# Altium PCB uz_per_torque_box.PcbDoc
Units mm, origin at the board's own origin, x right, y up, seen from the top; angles counter-clockwise.
Board outline 50 x 80 mm, 4 copper layers (Top Layer, Layer 1, Layer 2, Bottom Layer), stack 0.98 mm thick; 35 components, 27 nets, 113 pads, 16 vias.
Unrouted connection lines stored in the file: 108.
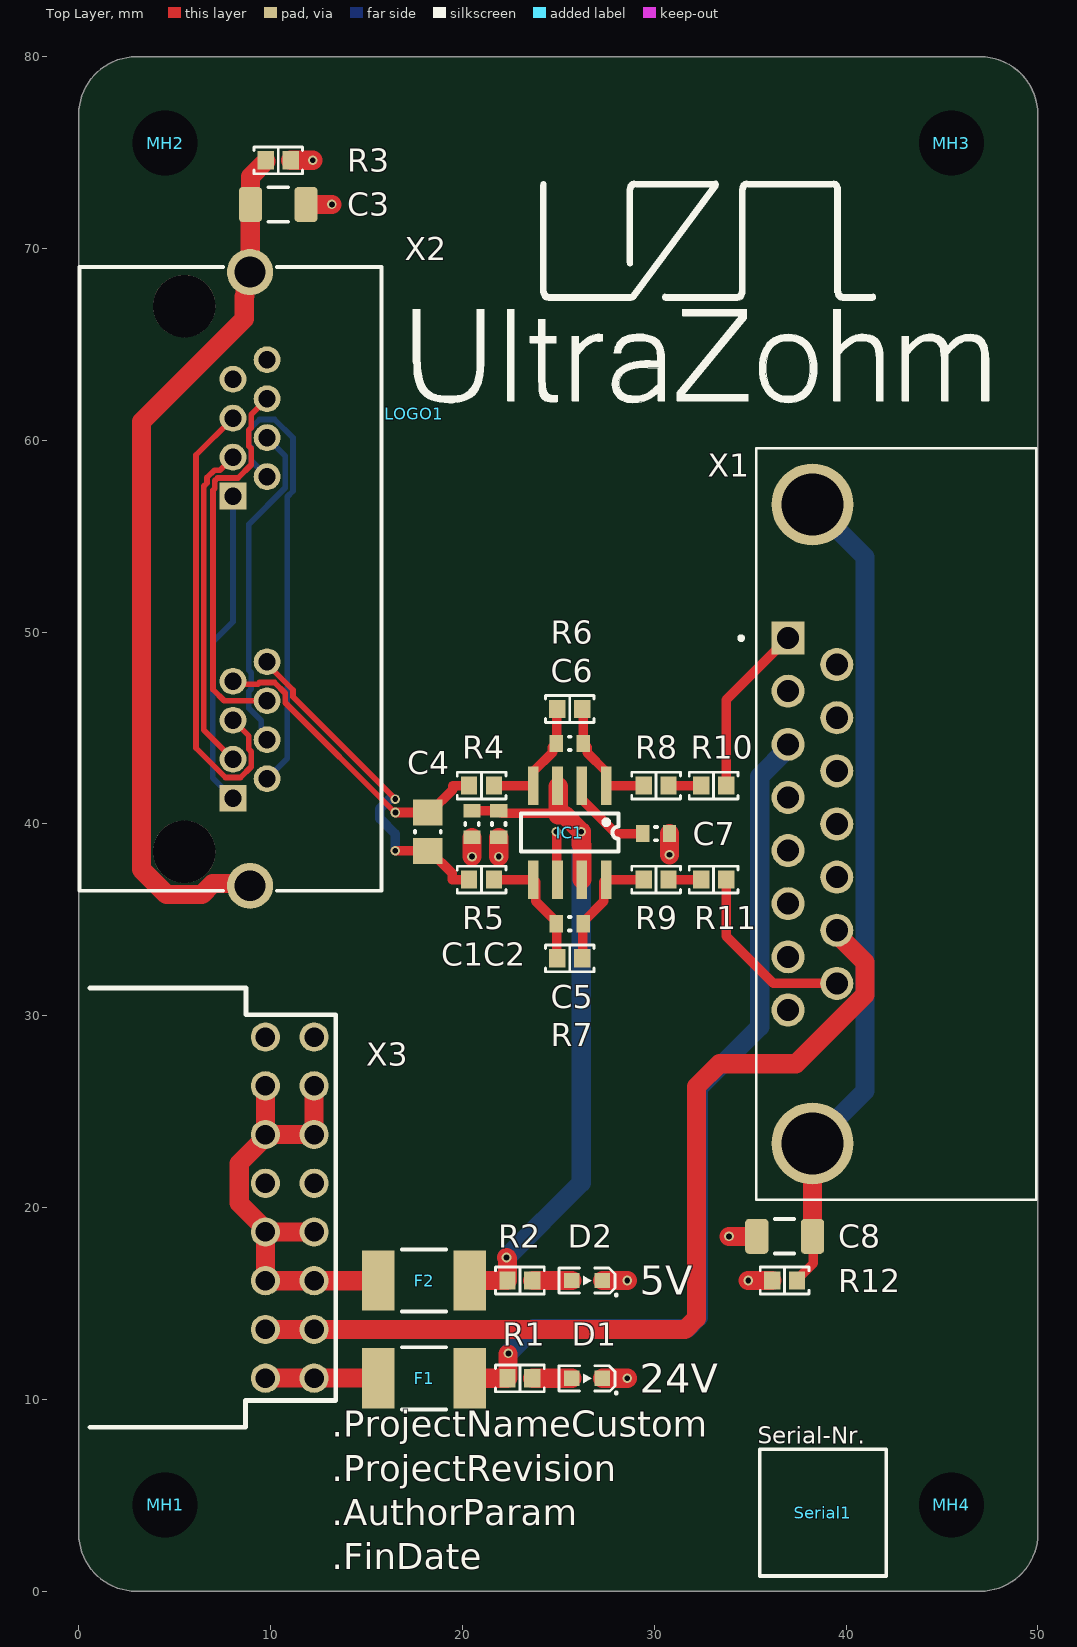
[diagram p0: Top Layer view]
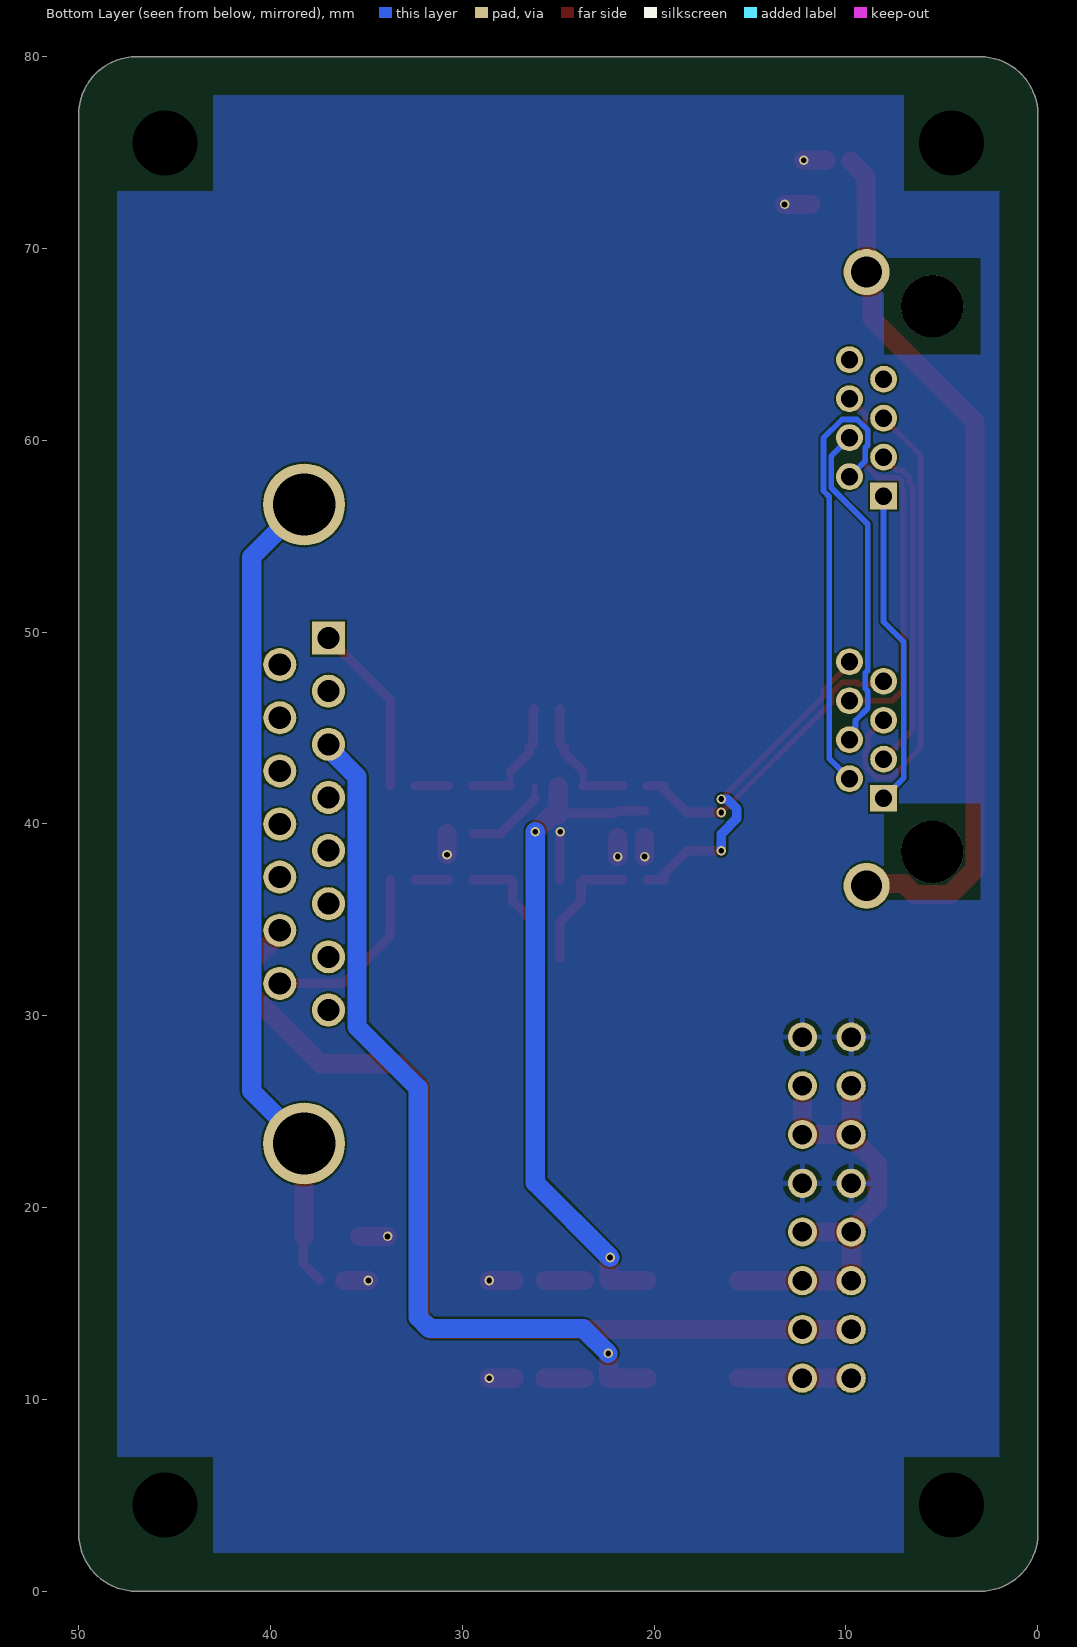
[diagram p1: Bottom Layer view, seen from below]
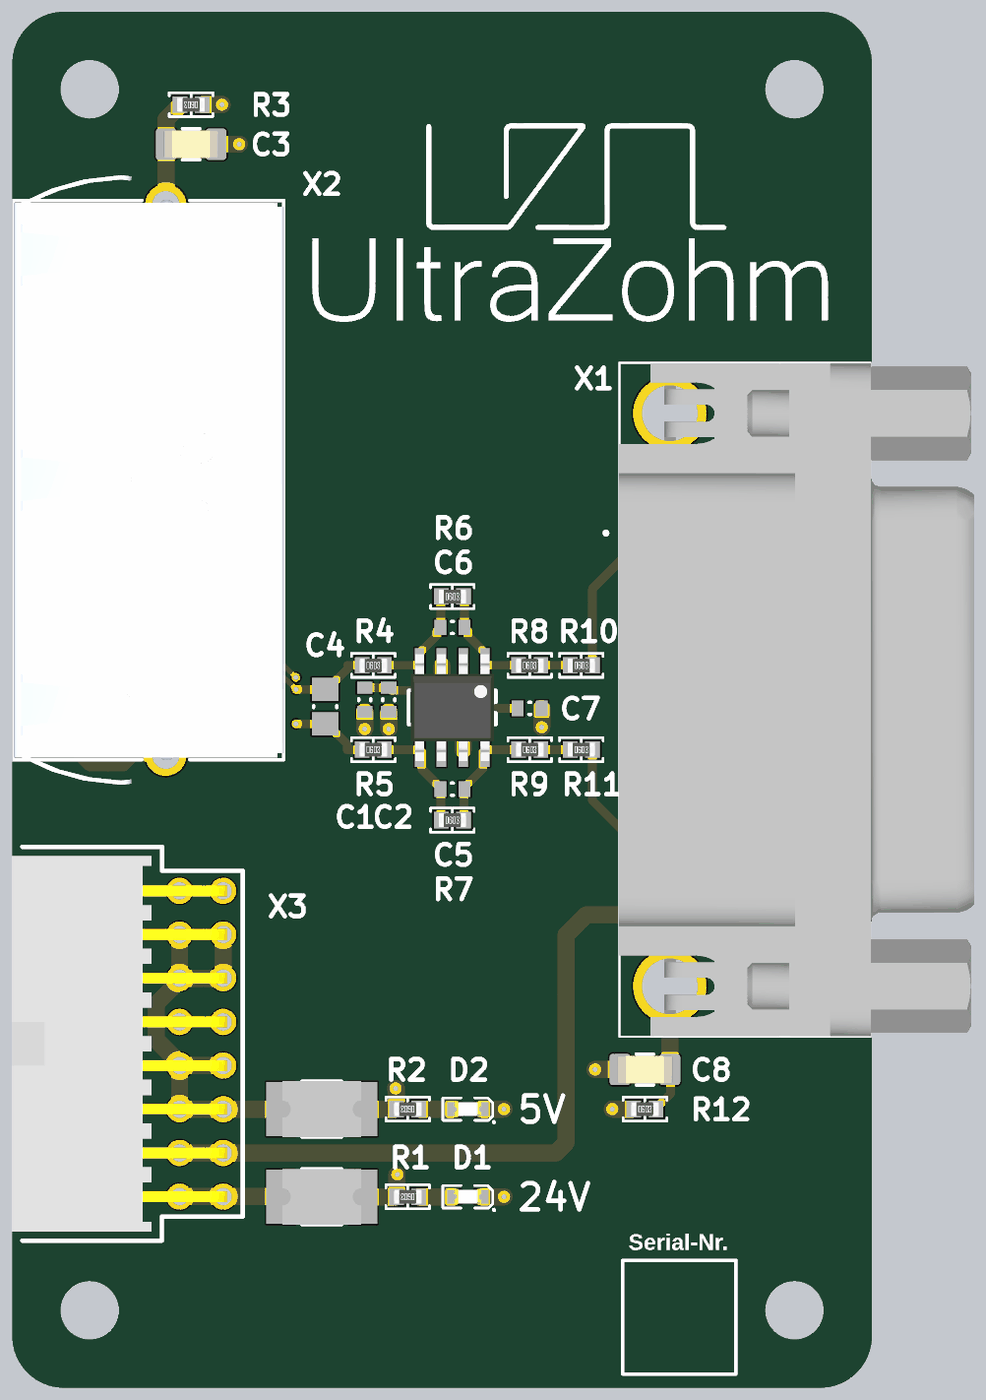
[diagram p2: 3D render of the assembled board from above, using the file's embedded part models]

## Layer stack, top to bottom
Top Solder: solder mask 0.0102, Solder Resist, Dk 3.5
Top Layer: signal copper 0.035
Dielectric 2: prepreg 0.115, FR-4, Dk 4.4
Dielectric 4: prepreg 0.115, FR-4, Dk 4.4
Layer 1: signal copper 0.035
Dielectric 1: core 0.38, Core-036, Dk 4.4
Layer 2: signal copper 0.035
Dielectric 5: prepreg 0.115, FR-4, Dk 4.4
Dielectric 3: prepreg 0.115, FR-4, Dk 4.4
Bottom Layer: signal copper 0.035
Bottom Solder: solder mask 0.0102, Solder Resist, Dk 3.5

## Board outline
0,3 ccw(c3,3) 3,0 47,0 ccw(c47,3) 50,3 50,77 ccw(c47,77) 47,80 3,80 ccw(c3,77) 0,77

## Design rules (kind name [scope] priority, off if disabled: settings)
AssemblyTestPointUsage [InNetClass('3V3_SingleEnded') or InNetClass('5V_SingleEnded') or InNetClass('15V_SingleEnded') or InNetClass('DifferentialSignals')] p1:
BoardOutlineClearance [All] p1: gap=0.5 ignorepadtopadclearanceinfootprint=FALSE except(0: Arc-SplitContinuation Track-SplitContinuation SMDPad-SplitContinuation THPad-SplitContinuation Via-SplitContinuation Fill-SplitContinuation Poly-SplitContinuation Region-SplitContinuation Text-SplitContinuation)
Clearance Clearance_Differential [InNetClass('DifferentialSignals')] p1: gap=0.1 ignorepadtopadclearanceinfootprint=TRUE except(0: Arc-Hole Track-Hole SMDPad-Hole THPad-Hole Via-Hole Fill-Hole Poly-Hole Region-Hole Text-Hole; 0.3: SMDPad-Via; 0.4: THPad-Via)
Clearance Clearance_Power [InNetClass('Power')] p2: gap=0.1 ignorepadtopadclearanceinfootprint=TRUE except(0: Arc-Hole Track-Hole SMDPad-Hole THPad-Hole Via-Hole Fill-Hole Poly-Hole Region-Hole Text-Hole; 0.15: Via-Poly; 0.2: Track-Poly; 0.25: THPad-Poly; 0.3: Fill-Poly Poly-Region; 0.5: Poly-Poly)
Clearance [All] p3: gap=0.1 ignorepadtopadclearanceinfootprint=TRUE except(0: Arc-Hole Track-Hole SMDPad-Hole THPad-Hole Via-Hole Fill-Hole Poly-Hole Region-Hole Text-Hole; 0.4: SMDPad-Via THPad-Via; 0.5: Poly-Poly)
ComponentClearance [All] p1: gap=0.1 collisioncheckmode=3 verticalgap=0.1 showdistances=FALSE
DiffPairsRouting [InNetClass('DifferentialSignals')] p1: maxlimit=0.25 minlimit=0.127 mostfreqgap=0.25 toplayer_maxgap=0.127 toplayer_prefgap=0.127 toplayer_minwidth=0.285 toplayer_maxwidth=0.285 toplayer_prefwidth=0.285 midlayer1_minwidth=0.069 midlayer1_maxwidth=0.15 midlayer1_prefwidth=0.15 midlayer2_mingap=0.165 midlayer2_minwidth=0.1 midlayer2_maxwidth=0.15 midlayer2_prefwidth=0.15 bottomlayer_maxgap=0.127 bottomlayer_prefgap=0.127 bottomlayer_minwidth=0.285 bottomlayer_maxwidth=0.285 bottomlayer_prefwidth=0.285 impedanceprofiledriven=TRUE impedanceprofileid={5F7DE71B-7B0B-4CDE-8AE7-8AD61221F3A5} impedanceprofilevalue=100.000000 maxuncoupledlength=12.7
FanoutControl Fanout_Power [InNetClass('Power') or InNet('ENABLE')] p1: bgadir=Out bgaviamode=Centered fanoutstyle=Auto fanoutdirection=None viagrid=0.025
FanoutControl Fanout_RS422 [InNetClass('DifferentialSignals')] p2: bgadir=Out bgaviamode=Closest fanoutstyle=Rows fanoutdirection=OutOnly viagrid=0.025
FanoutControl Fanout_BGA [IsBGA] p3 off: bgadir=Out bgaviamode=Centered fanoutstyle=Auto fanoutdirection=Alternating viagrid=0.025 // Fanout_BGA (Default Rule)
FanoutControl Fanout_LCC [IsLCC] p4 off: bgadir=Out bgaviamode=Centered fanoutstyle=Auto fanoutdirection=Alternating viagrid=0.025 // Fanout_LCC (Default Rule)
FanoutControl Fanout_SOIC [IsSOIC] p5 off: bgadir=Out bgaviamode=Centered fanoutstyle=Auto fanoutdirection=Alternating viagrid=0.025 // Fanout_SOIC (Default Rule)
FanoutControl Fanout_Small [(CompPinCount < 5)] p6 off: bgadir=Out bgaviamode=Centered fanoutstyle=Auto fanoutdirection=OutThenIn viagrid=0.025 // Fanout_Small (Default Rule)
FanoutControl Fanout_Default [All] p7: bgadir=NE bgaviamode=Closest fanoutstyle=Rows fanoutdirection=InOnly viagrid=0.025 // Fanout_Default (Default Rule)
Height [All] p1: minheight=0 maxheight=50 prefheight=12.7
HoleSize [All] p1: absolutevalues=TRUE maxlimit=4 minlimit=0.025 maxpercent=80.000 minpercent=20.000
PolygonConnect PolygonConnect_Therm [HoleSize > 2.6] p1: connectstyle=Direct reliefconductorwidth=0.254 reliefentries=4 polygonreliefangle="90 Angle" airgapwidth=0.254
PolygonConnect PolygonConnect_via [InPadClass('pad') or IsVia] p2: connectstyle=Direct reliefconductorwidth=0.254 reliefentries=4 polygonreliefangle="90 Angle" airgapwidth=0.254
PolygonConnect [All] p3: connectstyle=Relief reliefconductorwidth=0.3 reliefentries=4 polygonreliefangle="90 Angle" airgapwidth=0.25
RoutingLayers RoutingLayers_3V3Signals [InNetClass('3V3_SingleEnded')] p1 off: top layer_v5=TRUE mid layer 1_v5=TRUE mid layer 2_v5=TRUE bottom layer_v5=TRUE
RoutingLayers RoutingLayers_SingleEnded [InNetClass('15V_SingleEnded') or InNetClass('3V3_SingleEnded') or InNetClass('5V_SingleEnded')] p2 off: top layer_v5=TRUE mid layer 1_v5=TRUE mid layer 2_v5=TRUE bottom layer_v5=TRUE
RoutingLayers RoutingLayers_Differential [InNetClass('DifferentialSignals')] p3 off: top layer_v5=TRUE mid layer 1_v5=TRUE mid layer 2_v5=TRUE bottom layer_v5=FALSE
RoutingLayers [All] p4: top layer_v5=TRUE mid layer 1_v5=TRUE mid layer 2_v5=TRUE bottom layer_v5=TRUE
RoutingVias [All] p1: holewidth=0.3 width=0.5 viastyle="Through Hole" minholewidth=0.2 minwidth=0.4 maxholewidth=0.5 maxwidth=1
SolderMaskExpansion [All] p1: expansion=0.102 istentingtop=FALSE
SupplyNets "Schematic Supply Nets_9" [InNet('GND_VIN')] p1: voltage=0.000
SupplyNets "Schematic Supply Nets_8" [InNet('Supply+')] p2: voltage=0.000
SupplyNets "Schematic Supply Nets_7" [InNet('5V_ext')] p3: voltage=0.000
SupplyNets "Schematic Supply Nets_6" [InNet('GND')] p4: voltage=0.000
SupplyNets "Schematic Supply Nets_4" [InNet('VIN_unfused')] p5: voltage=0.000
SupplyNets "Schematic Supply Nets_2" [InNet('5V')] p6: voltage=0.000
UnRoutedNet UnRoutedNet_Signals [InNetClass('15V_SingleEnded') or InNetClass('3V3_SingleEnded') or InNetClass('5V_SingleEnded') or InNetClass('DifferentialSignals')] p1: checkbadconnections=TRUE
UnRoutedNet [All] p2: checkbadconnections=TRUE
Width Width_Power [InNetClass('Power')] p1: maxlimit=10 minlimit=0.2 preferedwidth=0.3 minimp=50.000000 maximp=50.000000 favimp=50.000000
Width [All] p2: maxlimit=10 minlimit=0.1 preferedwidth=0.3 midlayer1_prefwidth=0.15 midlayer2_prefwidth=0.15 minimp=50.000000 maximp=50.000000 favimp=50.000000
18 further rules are at their usual default settings.

## Classes and differential pairs
component class Torque_Signal_Conditioning: C1 C2 C3 C4 C5 C6 C7 C8 D1 D2 F1 F2 IC1 MH1 MH2 MH3 MH4 R1 R2 R3 R4 R5 R6 R7 R8 R9 R10 R11 R12 Torque_Signal_Conditioning X1 X2 X3
differential pair RJ: +RJ_P -RJ_N
differential pair Torque: +Torque_P -Torque_N

## Components (designator, comment, footprint, x,y, rotation, side; value= is the part's Value field where it differs from the comment)
C1 "0.1 µF" C_0603 20.5,40 r90 top
C2 "1 nF" C_0603 21.9,40 r90 top
C3 "100 pF" C_1206 10.4,72.3 r0 top
C4 "2.2 µF" C_0805 18.2,39.6 r90 top
C5 "22 pF" C_0603 25.6,34.8 r180 top
C6 "22 pF" C_0603 25.6,44.2 r180 top
C7 "1 µF" C_0603 30.1,39.5 r180 top
C8 "100 pF" C_1206 36.8,18.5 r180 top
D1 "150060BS84000" WL-SMCW_0603 26.5,11.1 r180 top
D2 "150060BS84000" WL-SMCW_0603 26.5,16.2 r180 top
F1 "Littelfuse_PTC_1812" 1812_PTC_Polyfuse_Littelfuse 18,11.1 r0 top value="PTC, 1.1 A, 24V"
F2 "Littelfuse_PTC_1812" 1812_PTC_Polyfuse_Littelfuse 18,16.2 r0 top value="PTC, 1.1 A, 24V"
IC1 "ADA4940-1ARZ-R7" SOIC-8-N 27.5,42 r270 top value="differential ADC driver"
INFO1 "Design Information" Design_info -8.5,-4.3 r0 top
LOGO1 "UZ Logo" UZ_Logo_small 17.5,61.4 r0 top
MH1 "Mounting Hole" MH_3.4#1 4.5,2.7 r90 top
MH2 "Mounting Hole" MH_3.4#2 4.4,74.4 r90 top
MH3 "Mounting Hole" MH_3.4#3 44.9,73.6 r90 top
MH4 "Mounting Hole" MH_3.4#4 47.4,4.9 r90 top
R1 "24k9" "RES 0603_1608" 23,11.1 r180 top
R2 "3k" "RES 0603_1608" 23,16.2 r180 top
R3 "1M" "RES 0603_1608" 10.4,74.6 r180 top
R4 "51R1" "RES 0603_1608" 21,42 r0 top
R5 "51R1" "RES 0603_1608" 21,37.1 r0 top
R6 "1k" "RES 0603_1608" 25.6,46 r0 top
R7 "1k" "RES 0603_1608" 25.6,33 r0 top
R8 "1k" "RES 0603_1608" 30.1,42 r0 top
R9 "1k" "RES 0603_1608" 30.1,37.1 r0 top
R10 "1k" "RES 0603_1608" 33.1,42 r0 top
R11 "1k" "RES 0603_1608" 33.1,37.1 r0 top
R12 "1M" "RES 0603_1608" 36.8,16.2 r0 top
Serial1 "Serialnumber 6.3 x 6.3 mm" SERIAL_6.3X6.3MM 38.8,4.1 r0 top value=REV
X1 "SUB-DRBF-607A-002" "PCB - MISC - DSUB15" 38.25,40 r90 top
X2 "RJHSE538002" RJHSE-5380-02 5.5,67 r270 top
X3 "IPL1-108-01-L-D-RA-K" IPL1-108-01-L-D-RA-K 11,20 r90 top

## Footprints (in the part's own frame and the unit in brackets; to place one, negate y for a bottom-side part, rotate by r counter-clockwise, add the part's x,y. Pads: shape width x height; smd on the part's side, far side on the other; paste and mask are expansions set on the pad)
1812_PTC_Polyfuse_Littelfuse [mm] "Chip Fuse, 2-Leads, Body 4.6x3.24mm"
  rect 1.68x3.14 smd: 1(-2.39,0) 2(2.39,0)
  silkscreen extent -1.15,-1.62 1.15,1.62, body extent -2.3,-1.62 2.3,1.62, height 1.15
C_0603 [mm] "Chip Capacitor, Body 1.6x0.8mm, Height 1.0mm, IPC High Density"
  rect 0.7x0.9 smd: 1(-0.7,0) 2(0.7,0)
  silkscreen extent -0.05,-0.35 0.05,0.35, body extent -0.87,-0.47 0.88,0.48, height 1
C_0805 [mm] "Chip Capacitor, Body 2.0x1.2mm, Height 1.45mm, IPC Low Density"
  rect 1.35x1.55 smd: 1(-1,0) 2(1,0)
  silkscreen extent -0.05,-0.67 0.05,0.67, body extent -1.1,-0.72 1.1,0.72, height 1.45
C_1206 [mm]
  rrect33% 1.21x1.82 smd: 1(1.45,0) 2(-1.45,0)
  silkscreen extent -0.5,-0.9 0.5,0.9, body extent -1.6,-0.81 1.6,0.81, height 1.82
Design_info [mm] "Design information about the PCB"
IPL1-108-01-L-D-RA-K [mil]
  round 60 hole 40 mask+3: 1(-350,50) 2(-250,50) 3(-150,50) 4(-50,50) 5(50,50) 6(150,50) 7(250,50) 8(350,50) 9(-350,-50) 10(-250,-50) 11(-150,-50) 12(-50,-50) 13(50,-50) 14(150,-50) 15(250,-50) 16(350,-50)
  silkscreen extent -451,-94 451,410, body extent -430,-58 430,434, height 310
MH_3.4#1 [mm]
  round 3.1 hole 3.4 unplated: 1(1.8,0)
MH_3.4#2 [mm]
  round 3.1 hole 3.4 unplated: 1(1.1,-0.1)
MH_3.4#3 [mm]
  round 3.1 hole 3.4 unplated: 1(1.9,-0.6)
MH_3.4#4 [mm]
  round 3.1 hole 3.4 unplated: 1(-0.4,1.9)
"PCB - MISC - DSUB15" [mm]
  rect 1.725x1.725 / inner round 1.725 / far side rect 1.725x1.725 hole 1.15: 1(9.695,1.27)
  round 1.725 hole 1.15: 2(6.925,1.27) 3(4.155,1.27) 4(1.385,1.27) 5(-1.385,1.27) 6(-4.155,1.27) 7(-6.925,1.27) 8(-9.695,1.27) 9(8.31,-1.27) 10(5.54,-1.27) 11(2.77,-1.27) 12(0,-1.27) 13(-2.77,-1.27) 14(-5.54,-1.27) 15(-8.31,-1.27)
  round 4.266 hole 3.25: S1(-16.66,0) S2(16.66,0)
  silkscreen extent -19.6,-11.67 19.6,3.82, body extent -19.57,-17.7 19.57,2.95, height 13.79
"RES 0603_1608" [mm] "Chip Resistor, 2-Leads, Body 1.60x0.80mm, IPC Medium Density"
  rect 0.85x0.95 smd: 1(-0.65,0) 2(0.65,0)
  silkscreen extent -1.27,-0.7 1.27,0.7, body extent -0.8,-0.4 0.8,0.4, height 0.45
RJHSE-5380-02 [mm] "Modular Jack Horizontal Shielded Dual Port 8P8C Tab Up"
  rect 1.4x1.4 hole 0.9: A1(9.906,2.54) B1(25.654,2.54)
  round 1.4 hole 0.9: A2(8.89,4.318) A3(7.874,2.54) A4(6.858,4.318) A5(5.842,2.54) A6(4.826,4.318) A7(3.81,2.54) A8(2.794,4.318) B2(24.638,4.318) B3(23.622,2.54) B4(22.606,4.318) B5(21.59,2.54) B6(20.574,4.318) B7(19.558,2.54) B8(18.542,4.318)
  round 3.25 hole 3.25 unplated: MH1(0,0) MH2(28.448,0)
  round 2.4 hole 1.6: S1(-1.778,3.429) S2(30.226,3.429)
  silkscreen extent -2.03,-5.46 30.48,10.29, body extent -3.5,-5.41 31.95,10.29, height 15.06
SERIAL_6.3X6.3MM [mm]
  silkscreen extent -3.3,-3.3 3.3,3.3
SOIC-8-N [mm] "SMD Small Outline IC 8 pin Narrow"
  rect 2x0.55 smd: 1(0,0) 2(0,-1.27) 3(0,-2.54) 4(0,-3.81) 5(4.9,-3.81) 6(4.9,-2.54) 7(4.9,-1.27) 8(4.9,0)
  silkscreen extent 1.46,-4.44 3.44,0.64, body extent -0.64,-4.32 5.56,0.51, height 1.7
UZ_Logo_small [mm] "logo width 3cm"
  silkscreen extent -0.05,0.57 29.94,12.12
WL-SMCW_0603 [mm] "SMD Mono-color Chip LED, body 1.6x0.8mm"
  rect 0.8x0.8 smd: 1(-0.8,0) 2(0.8,0)
  silkscreen extent -1.59,-0.65 1.45,0.83, body extent -0.8,-0.4 0.8,0.4, height 0.7

## Part data
C1: library part C0603X104K5RAC7411, "Capacitor 0603, 50 VDC, 0.1 µF, X7R", Device Package=0603, LCSC Part Number=C14663, Manufacturer=KEMET, Operating Temperature="-55 - 125°C", Supplier Part Number 1=80-C0603X104K5R7411, Tolerance="10 %", Voltage Rating="50 VDC", Component Type="Capacitor 0603", ComponentLink1Description=Datasheet, ComponentLink1URL=https://www.mouser.de/datasheet/2/212/1/KEM_C1013_X7R_FT_CAP_SMD-1103280.pdf, Created from=MGremer, Created On="20.12.2020 13:54:13", Last Updated="04.03.2021 09:24:28", Live Cycle Status=1, Manufacturer Part Number=C0603X104K5RAC7411, Mounting Type=SMD, PartID=3, Series="SMD Comm X7R Flex", Stock number="Labor SMD Container", Supplier 1=Mouser, Supplier 2=LCSC, Supplier Part Number 2=C14663, Type=Capacitor
C2: library part CC0603JRNPO9BN102, "Capacitor 0603, 50 VDC, 1 nF, NP0", Device Package=0603, LCSC Part Number=C106246, Manufacturer=YAGEO, Operating Temperature="-55 - 125°C", Tolerance="5 %", Voltage Rating="50 VDC", Component Type="Capacitor 0603", ComponentLink1Description=Datasheet, ComponentLink1URL=https://datasheet.lcsc.com/lcsc/1811021411_YAGEO-CC0603JRNPO9BN102_C106246.pdf, Created from=AGeiger, Created On="30.08.2022 11:46:28", Last Updated="30.08.2022 11:46:28", Live Cycle Status=1, Manufacturer Part Number=CC0603JRNPO9BN102, Mounting Type=SMD, PartID=104, Series=NP0, Supplier 1=LCSC, Supplier Part Number 1=C106246, Type=Capacitor
C3 C8: library part 885342008009, "Capacitor 1206, 1 kVDC, 100 pF, C0G", Device Package=1206, Manufacturer="Wuerth Elektronik", Operating Temperature="-55 - 125°C", Supplier Part Number 1=710-885342008009, Tolerance="5 %", Voltage Rating="1 kVDC", Component Type="Capacitor 1206", ComponentLink1Description=Datasheet, ComponentLink1URL=https://www.mouser.de/datasheet/2/445/885342008009-1727900.pdf, Created from=MGremer, Created On="20.12.2020 13:54:13", Last Updated="20.12.2020 17:44:37", Live Cycle Status=1, Manufacturer Part Number=885342008009, Mounting Type=SMD, PartID=62, Series=WCAP-CSMH, Stock number="Labor SMD Container", Supplier 1=Mouser, Type=Capacitor
C4: library part C0805X225J4RECAUTO, "Capacitor 0805, 16 VDC, 2.2 µF, X7R", Device Package=0805, Manufacturer=KEMET, Operating Temperature="-55 - 125°C", Supplier Part Number 1=80-C0805X225J4RECAUT, Tolerance="5 %", Voltage Rating="16 VDC", Component Type="Capacitor 0805", ComponentLink1Description=Datasheet, ComponentLink1URL=https://www.mouser.de/datasheet/2/212/1/KEM_C1090_X7R_ESD-1103328.pdf, Created from=MGremer, Created On="20.12.2020 13:54:13", Last Updated="20.12.2020 16:34:30", Live Cycle Status=1, Manufacturer Part Number=C0805X225J4RECAUTO, Mounting Type=SMD, PartID=79, Series=CC, Stock number="Labor SMD Container", Supplier 1=Mouser, Type=Capacitor
C5 C6: library part C0603C220J5RACTU, "Capacitor 0603, 50 VDC, 22 pF, X7R", Device Package=0603, Manufacturer=KEMET, Operating Temperature="-55 - 125°C", Supplier Part Number 1=80-C0603C220J5R, Tolerance="5 %", Voltage Rating="50 VDC", Component Type="Capacitor 0603", ComponentLink1Description=Datasheet, ComponentLink1URL=https://www.mouser.de/datasheet/2/212/KEM_C1002_X7R_SMD-1102033.pdf, Created from=MGremer, Created On="20.12.2020 13:54:13", Last Updated="20.01.2021 13:57:36", Live Cycle Status=1, Manufacturer Part Number=C0603C220J5RACTU, Mounting Type=SMD, PartID=78, Series="SMD Comm X7R", Stock number="not stored", Supplier 1=Mouser, Type=Capacitor
C7: library part UMK107AB7105KA-T, "50V 1uF X7R ±10% 0603 Multilayer Ceramic Capacitors MLCC - SMD/SMT ROHS", Device Package=0603, LCSC Part Number=C105174, Manufacturer="Taiyo Yuden", Operating Temperature="-55 - 125°C", Tolerance="10 %", Voltage Rating="50 VDC", Component Type="Capacitor 0603", ComponentLink1Description=Datasheet, ComponentLink1URL=https://www.mouser.de/datasheet/2/396/mlcc02_e-1307760.pdf, Created from=NDiringer, Created On="09.08.2022 09:35:02", Last Updated="21.09.2022 16:11:37", Live Cycle Status=1, Manufacturer Part Number=UMK107AB7105KA-T, Mounting Type=SMD, PartID=98, Series=X7R, Stock number="not stored", Supplier 1=LCSC, Supplier 2=Mouser, Supplier Part Number 1=C105174, Supplier Part Number 2=963-UMK107AB7105MA-T, Type=Capacitor
D1: "WL-SMCW SMD Mono-color Chip LED Waterclear Blue", Color=blue, Device Package=0603, Forward Current I_f="20 mA", Forward Voltage U_f="3.2 V", Manufacturer="Wuerth Elektronik", Nominal Power="78 mW", Operating Temperature="-40 - 85 °C", Supplier Part Number 1=710-150060BS84000, Component Type="LED Diode", ComponentLink1Description=Datasheet, ComponentLink1URL=https://www.mouser.de/datasheet/2/445/150060BS84000-1838909.pdf, Created from=MGremer, Created On="08.12.2020 10:19:38", Last Updated="03.03.2021 09:59:51", Light Intensity="560 mcd", Live Cycle Status=1, Manufacturer Part Number=150060BS84000, Mounting Type=SMD, PartID=1, Stock number="not stored", Supplier 1=Mouser, Supplier 2=Farnell, Supplier 3=Digi-Key, Supplier Part Number 2=3408611, Supplier Part Number 3=732-150060BS84000CT-ND, Type=Standard, Wavelength="470 nm"
D2: "WL-SMCW SMD Mono-color Chip LED Waterclear Blue", Color=blue, Device Package=0603, Forward Current I_f="20 mA", Forward Voltage U_f="3.2 V", LCSC Part Number=C5197644, Manufacturer="Wuerth Elektronik", Nominal Power="78 mW", Operating Temperature="-40 - 85 °C", Supplier Part Number 1=710-150060BS84000, Component Type="LED Diode", ComponentLink1Description=Datasheet, ComponentLink1URL=https://www.mouser.de/datasheet/2/445/150060BS84000-1838909.pdf, Created from=MGremer, Created On="08.12.2020 10:19:38", Last Updated="21.02.2024 14:46:49", Light Intensity="560 mcd", Live Cycle Status=1, Manufacturer Part Number=150060BS84000, Mounting Type=SMD, PartID=1, Stock number="not stored", Supplier 1=Mouser, Supplier 2=Farnell, Supplier 3=Digi-Key, Supplier Part Number 2=3408611, Supplier Part Number 3=732-150060BS84000CT-ND, Type=Standard, Wavelength="470 nm"
F1 F2: "POLYSWITCH RESETTABLE DEVICES", Hold Current=1.1A, LCSC Part Number=C70119, Manufacturer=Littelfuse, MPN=miniASMDC110F/24, Nominal current="1 A", Operating Temperature="-40 - 85 °C", Package=1812, Resistance="0.18 Ohm", Supplier Part Number 1=530-0ZCG0150BF2C, Trip Current=2.2A, Voltage=24V, Component Type=Littelfuse_PTC_1812, ComponentLink1Description=Datasheet, ComponentLink1URL=https://www.littelfuse.com/~/media/electronics/datasheets/resettable_ptcs/littelfuse_ptc_surface_mount_catalog_datasheet.pdf.pdf, Created=2019_02_10_AGeiger, Created from=MHlatky, Created On="07.05.2021 06:50:33", Last Updated="27.05.2022 15:06:17", Live Cycle Status=1, Manufacturer Part Number=Littelfuse_PTC_1812, MF=Littelfuse, Mounting Type=SMD, PartID=5, Supplier 1=Mouser, Type=Fuse
IC1: "Differential ADC Driver", Device Package=SOIC-8, Manufacturer="Analog Devices", Operating Temperature="-40 - 105 °C", Package Reference=SOIC-N-8, Supplier Part Number 1=584-ADA4940-1ARZ-R7, Best.-Nr.="Farnell 209-6178", Channels=1, Class I=Analog, Class II="Fully Differential ADC Drivers (-40-125°C)", Component Type=ADC, ComponentLink1Description=Datasheet, ComponentLink1URL=https://www.mouser.de/datasheet/2/609/ADA4940-1_4940-2-878284.pdf, Created from=MGremer, Created On="15.01.2021 12:16:53", Datasheet="DSO11449, Ver. Aug 2000", Last edited="04.01.2007 10:14", Last Updated="22.11.2021 15:19:18", Live Cycle Status=1, Manufacturer Part Number=ADA4940-1ARZ-R7, Mounting Type=SMD, PartID=3, Resolution=-, Stock number="not stored", Supplier 1=Mouser, Type=ADC
INFO1: Manufacturer=UltraZohm, Supplier Part Number 1=-, Component Type="Design Information", ComponentLink1Description=https://docs.ultrazohm.com/, ComponentLink1URL=homepage, Created from=MGremer, Created On="03.11.2021 09:04:23", Last Updated="03.11.2021 09:28:34", Live Cycle Status=1, Manufacturer Part Number="Design Information", PartID=12, Supplier 1=-, Type="Design Information"
LOGO1: library part 1, "Official Project Logo of the UltraZohm", Manufacturer="PCB Manufacturer", Manufacturer Part Number="UltraZohm Logo", Component Type=Logo, ComponentLink1Description=Homepage, ComponentLink1URL=https://ultrazohm.com, Created from="T. Wendt", Created On="19.02.2021 16:55:56", Last Updated="02.03.2021 14:31:24", Live Cycle Status=1, PartID=1, Type="Standard (No BOM)"
MH1 MH2 MH3 MH4: Device Package=-, Component Type="Mounting Hole", ComponentLink1Description=Datasheet, Created from=MHlatky, Created On="26.01.2021 09:19:51", Last Updated="21.03.2022 23:05:12", Live Cycle Status=1, Manufacturer="Mounting Hole", Manufacturer Part Number="Mounting Hole", PartID=16, Stock number="not stored", Supplier 1="Mounting Hole", Supplier Part Number 1="Mounting Hole", Type="Mounting Hole"
R1: library part CRCW060324K9FKEA, "SMD resistor 1%", Device Package=0603, Manufacturer=Vishay, Supplier Part Number 1=71-CRCW0603-24.9K-E3, Tolerance=1%, Component Type="SMD resistor", ComponentLink1Description=Datasheet, ComponentLink1URL=https://www.mouser.de/datasheet/2/427/dcrcwe3-1762152.pdf, Created from=MGremer, Created On="14.12.2020 16:17:14", Last Updated="02.03.2021 14:07:32", Live Cycle Status=1, Manufacturer Part Number=CRCW060324K9FKEA, Mounting Type=SMD, PartID=157, Stock number="not stored", Supplier 1=Mouser, Type=Resistor
R2: library part RK73B1JTTD302J, "SMD resistor E24 series", Device Package=0603, Manufacturer="KOA Speer", Supplier Part Number 1=660-RK73B1JTTD302J, Tolerance=5%, Component Type="SMD resistor", ComponentLink1Description=Datasheet, ComponentLink1URL=https://www.mouser.de/datasheet/2/219/RK73B-1825463.pdf, Created from=MGremer, Created On="14.12.2020 16:17:14", Last Updated="02.03.2021 14:07:32", Live Cycle Status=1, Manufacturer Part Number=RK73B1JTTD302J, Mounting Type=SMD, PartID=85, Stock number="Labor SMD Container", Supplier 1=Mouser, Type=Resistor
R3 R12: library part RK73B1JTTDD105J, "SMD resistor E24 series", Device Package=0603, LCSC Part Number=C22935, Manufacturer="KOA Speer", Supplier Part Number 1=660-RK73B1JTTDD105J, Tolerance=5%, Component Type="SMD resistor", ComponentLink1Description=Datasheet, ComponentLink1URL=https://www.mouser.de/datasheet/2/219/RK73B-1825463.pdf, Created from=MGremer, Created On="14.12.2020 16:17:14", Last Updated="27.05.2022 14:05:13", Live Cycle Status=1, Manufacturer Part Number=RK73B1JTTDD105J, Mounting Type=SMD, PartID=146, Stock number="Labor SMD Container", Supplier 1=Mouser, Type=Resistor
R4 R5: library part RT0603BRD0751R1L, "SMD resistor 0.1%", Device Package=0603, LCSC Part Number=C2684558, Manufacturer=YAGEO, Supplier Part Number 1=603-RT0603BRD0751R1L, Tolerance=0.1%, Component Type="SMD resistor", ComponentLink1Description=Datasheet, ComponentLink1URL=https://www.mouser.de/datasheet/2/447/PYu_RT_1_to_0_01_RoHS_L_11-1669912.pdf, Created from=DHufnagel, Created On="14.12.2020 16:17:14", Last Updated="07.06.2024 22:56:33", Live Cycle Status=1, Manufacturer Part Number=RT0603BRD0751R1L, Mounting Type=SMD, PartID=212, Stock number="not stored", Supplier 1=Mouser, Type=Resistor
R6 R7 R8 R9 R10 R11: library part PCF-W0603LF-03-1001-B-P-LT, "SMD resistor 0.1%", Device Package=0603, LCSC Part Number=C110776, Manufacturer="IRC / TT Electronics", Supplier Part Number 1=66-PCFW0603LF031001B, Tolerance=0.1%, Component Type="SMD resistor", ComponentLink1Description=Datasheet, ComponentLink1URL=https://www.mouser.de/datasheet/2/414/PCF-1528243.pdf, Created from=MGremer, Created On="14.12.2020 16:17:14", Last Updated="21.02.2024 15:45:55", Live Cycle Status=1, Manufacturer Part Number=PCF-W0603LF-03-1001-B-P-LT, Mounting Type=SMD, PartID=163, Stock number="not stored", Supplier 1=Mouser, Type=Resistor
Serial1: library part "Serial Number", "Serial Number", Manufacturer=UltraZohm, Supplier Part Number 1=-, Component Type="Serial Number", ComponentLink1Description=https://docs.ultrazohm.com/, ComponentLink1URL=homepage, Created=2018_09_18_AGeiger, Created from=MGremer, Created On="03.11.2021 09:04:23", Last Updated="03.11.2021 09:28:34", Live Cycle Status=1, Manufacturer Part Number="Serial Number", PartID=11, Supplier 1=-, Type="Serial Number"
X1: "15 Female D-Sub Shrouded 2 3A -40℃~+85℃ Plugin D-Sub/DVI/HDMI Connectors ROHS", BOM_JLCPCB Part Class="Extended Part", BOM_Manufacturer=Nextron(台湾正凌), Device Package=THT, LCSC Part Number=C2846090, Manufacturer="Nextron(Nextronics Engineering)", Operating Temperature=-40℃~+85℃, BOM_Manufacturer Part=SUB-DRBF-607A-002, BOM_Supplier=LCSC, BOM_Supplier Part=C2846090, Component Type="DSUB 15 pole female", ComponentLink1Description=Datasheet, ComponentLink1URL=https://jlcpcb.com/partdetail/3039947-SUB_DRBF_607A002/C2846090, Contributor=LCSC, Created from=NDiringer, Created On="17.03.2023 15:40:49", Last Updated="04.05.2023 15:17:49", Live Cycle Status=1, Manufacturer Part Number=SUB-DRBF-607A-002, Mounting Type=SMD, PartID=7, spicePre=D, spiceSymbolName=SUB-DRBF-607A-002, Stock number="not stored", Supplier 1=LCSC, Supplier Part Number 1=C2846090, Type="DSUB 15 pole"
X2: "CAT5, RJ45 Connector, 1x2", Device Package=RJ45, Manufacturer=Amphenol, Supplier Part Number 1=1860605, Component Type="RJ45 Connector", ComponentLink1Description=Datasheet, ComponentLink1URL=https://www.farnell.com/cad/2360382.pdf, Created from=MGremer, Created On="22.02.2021 16:43:38", Last Updated="22.02.2021 16:43:38", Live Cycle Status=1, Manufacturer Part Number=RJHSE538002, Mounting Type=THT, PartID=4, Series=RJHSE, Stock number="not stored", Supplier 1=Farnell, Type="RJ45 Connector"
X3: "2.54 mm Double Row Termin Assembly (right angle)", Device Package=Connector, Manufacturer=SAMTEC, Component Type="Samtec Connector", ComponentLink1Description=Homepage, ComponentLink1URL=https://www.samtec.com/products/ipl1, Created from=MGremer, Created On="30.11.2020 10:36:28", Last Updated="15.02.2021 09:17:39", Live Cycle Status=1, Manufacturer Part Number=IPL1-108-01-L-D-RA-K, Mounting Type=THT, Number of positions=8, Number of rows=2, PartID=17, Stock number="not stored", Supplier 1=SAMTEC, Supplier Part Number 1=IPL1-108-01-L-D-RA-K, Type=Connector

## Via types
v1: diameter 0.5, hole 0.3, Top Layer to Bottom Layer, 16 vias

## Nets (pads, with @x,y where several pads share a name; then routed paths per layer and width w, separated by ;. In a path a pad name is that pad's centre, name@x,y a point inside that pad or via, vN(x,y) a via of type N, cw(c..) or ccw(c..) an arc to the next point about the centre after c; other vN are vias at no path point)
5V: C1.2 C2.2 F2.2 IC1.3 IC1.7 R2.2 | length 37.2
  Top Layer w0.3: C2.2 C2.2@22.05,40.55 ; 24.926,40.55 25,40.476 25.324,40.476 ; IC1.3 IC1.3@25,41.96
  Top Layer w0.5: C1.2 C2.2 ; C2.2@22.05,40.55 24.926,40.55
  Top Layer w1: F2.2 R2.2 22.35,17.35 v1(22.3,17.4) ; 25,40.476 IC1.3@25,41.96 ; 25.324,40.476 v1(26.2,39.6) 26.2,38.924 26.23,38.894 IC1.7
  Bottom Layer w1: v1(22.3,17.4) 26.2,21.3 v1(26.2,39.6)
5V_ext: F2.1 X3.3 X3.4 X3.6 X3.7 X3.11 X3.12 X3.14 X3.15 | length 24.8
  Top Layer w0.3: F2.1@15.6,16.19 F2.1
  Top Layer w1: X3.7 X3.6 ; X3.12 X3.4 ; X3.15 X3.14 X3.6 ; F2.1@15.6,16.19 X3.11 X3.3 X3.4 ; X3.4 9.73,18.872 8.368,20.234 8.368,22.306 9.73,23.668 X3.6
GND: C1.1 C2.1 C3.1 C7.1 C8.1 D1.1 D2.1 IC1.6 R3.1 R12.1 X3.5 X3.8 X3.13 X3.16 | length 13.4
  Top Layer w0.254: v1(24.9,39.6) v1@24.93,39.57 ; IC1.6@24.93,37.13 IC1.6
  Top Layer w0.5: IC1.6@24.93,37.13 v1@24.93,39.57
  Top Layer w1: R3.1 v1(12.2,74.6) ; C3.1 v1(13.2,72.3) ; v1(20.5,38.3) C1.1 ; v1(21.9,38.3) C2.1 ; D1.1 v1(28.6,11.1) ; D2.1 v1(28.6,16.2) ; v1(30.8,38.4) C7.1 ; v1(33.9,18.5) C8.1 ; v1(34.9,16.2) R12.1
GND_VIN: X1.14 X3.2 X3.10 | length 49.5
  Top Layer w1: X3.2 X3.10 31.614,13.65 32.2,14.236 32.2,26.3 33.4,27.5 37.398,27.5 40.983,31.084 40.983,32.801 39.52,34.264 X1.14
NetC3_2: C3.2 R3.2 X2.S1 X2.S2 | length 46.1
  Top Layer w0.3: X2.S1 X2.S1@8.939,68.789 ; C3.2@8.939,72.289 C3.2 ; R3.2@9.75,74.55 R3.2
  Top Layer w1: X2.S2 8.808,36.895 6.99,36.895 6.422,36.327 4.578,36.327 3.275,37.63 3.275,60.975 8.628,66.328 8.628,67.492 8.661,67.525 8.661,68.51 X2.S1 ; X2.S1@8.939,68.789 C3.2@8.939,72.289 ; C3.2 8.95,73.75 R3.2@9.75,74.55
NetC5_1: C5.1 IC1.8 R7.2 R9.1 | length 6.6
  Top Layer w0.3: R7.2 R7.2@26.275,33.025 ; C5.1@26.275,34.775 C5.1 C5.1@26.3,34.9 ; IC1.8@27.375,36.975 IC1.8
  Top Layer w0.5: R7.2@26.275,33.025 C5.1@26.275,34.775 ; C5.1@26.3,34.9 27.375,35.975 IC1.8@27.375,36.975 ; IC1.8 R9.1
NetC5_2: C5.2 IC1.5 R5.2 R7.1 | length 6.7
  Top Layer w0.3: IC1.5 IC1.5@23.815,36.975 ; C5.2@24.9,34.9 C5.2 C5.2@24.925,34.775 ; R7.1@24.925,33.025 R7.1
  Top Layer w0.5: R5.2 IC1.5 ; IC1.5@23.815,36.975 23.815,35.985 C5.2@24.9,34.9 ; R7.1@24.925,33.025 C5.2@24.925,34.775
NetC6_1: C6.1 IC1.1 R6.2 R8.1 | length 6.5
  Top Layer w0.3: IC1.1 IC1.1@27.5,42.725
  Top Layer w0.5: R6.2 26.3,45.95 C6.1 26.5,44 26.5,43.725 IC1.1@27.5,42.725 ; IC1.1 R8.1
NetC6_2: C6.2 IC1.4 R4.2 R6.1 | length 6.6
  Top Layer w0.3: IC1.4 IC1.4@23.69,42.725 ; C6.2 C6.2@24.925,44.225 ; R6.1@24.925,45.975 R6.1
  Top Layer w0.5: R4.2 IC1.4 ; IC1.4@23.69,42.725 24.7,43.735 24.7,44 C6.2 ; C6.2@24.925,44.225 R6.1@24.925,45.975
NetC7_2: C7.2 IC1.2 | length 4.6
  Top Layer w0.3: IC1.2@26.23,41.275 IC1.2
  Top Layer w0.5: IC1.2@26.23,41.275 28.005,39.5 C7.2
NetC8_2: C8.2 R12.2 X1.S1 X1.S2 | length 43.1
  Top Layer w0.3: R12.2 R12.2@37.45,16.25 ; C8.2 C8.2@38.3,18.45
  Top Layer w0.5: R12.2@37.45,16.25 38.3,17.1 C8.2@38.3,18.45
  Top Layer w1: C8.2 X1.S1
  Bottom Layer w1: X1.S1 40.983,26.073 40.983,53.927 X1.S2
NetD1_2: D1.2 R1.1 | length 2
  Top Layer w1: R1.1 D1.2
NetD2_2: D2.2 R2.1 | length 2
  Top Layer w1: R2.1 D2.2
NetR8_2: R8.2 R10.1 | length 1.7
  Top Layer w0.5: R8.2 R10.1
NetR9_2: R9.2 R11.1 | length 1.7
  Top Layer w0.5: R9.2 R11.1
NetX2_A1: X2.A1 X2.B1 | length 16.6
  Bottom Layer w0.3: X2.B1 6.99,42.396 6.99,49.494 8.04,50.544 X2.A1
NetX2_A2: X2.A2 X2.B2 | length 24.1
  Bottom Layer w0.3: X2.B2 10.868,43.412 10.868,57.06 11.168,57.36 11.168,60.136 10.212,61.092 9.424,61.092 8.868,60.536 8.868,59.748 8.99,59.626 8.99,58.938 X2.A2
NetX2_A3: X2.A3 X2.B3 | length 17.2
  Top Layer w0.3: X2.B3 6.518,44.9 6.518,57.604 6.69,57.776 6.69,58.063 7.071,58.444 7.358,58.444 X2.A3
NetX2_A4: X2.A4 X2.B4 | length 17.4
  Bottom Layer w0.3: X2.B4 9.818,44.692 9.509,45 9.509,45.391 8.868,46.032 8.868,46.926 8.99,47.048 8.99,47.889 8.868,48.011 8.868,55.626 10.768,57.526 10.768,59.192 X2.A4
NetX2_A5: X2.A5 X2.B5 | length 24.6
  Top Layer w0.3: X2.B5 8.868,44.582 8.868,43.894 8.99,43.772 8.99,42.984 8.434,42.428 7.646,42.428 6.118,43.956 6.118,59.236 X2.A5
NetX2_A6: X2.A6 X2.B6 | length 20.1
  Top Layer w0.3: X2.B6 7.59,46.426 7,47.016 7,57.4 7.09,57.49 7.09,57.898 7.236,58.044 8.302,58.044 8.99,58.732 8.99,59.573 8.868,59.695 8.868,60.536 8.99,60.658 8.99,61.346 X2.A6
RJ_N: C4.1 R5.1 X2.B8 | length 18.1
  Top Layer w0.3: X2.B8 9.818,48.335 11.168,46.985 11.168,46.632 v1(16.5,41.3) ; C4.1 C4.1@18.3,38.6
  Top Layer w0.5: v1(16.5,38.6) C4.1 ; C4.1@18.3,38.6 19.475,37.425 19.475,37.1 R5.1
  Bottom Layer w0.5: v1(16.5,38.6) 16.5,39.484 15.7,40.284 15.7,40.8 16.2,41.3 v1(16.5,41.3)
RJ_P: C4.2 R4.1 X2.B7 | length 16.2
  Top Layer w0.3: X2.B7 8.19,47.292 9.34,47.292 9.424,47.376 10.212,47.376 10.768,46.82 10.768,46.325 16.493,40.6 v1(16.507,40.6) ; C4.2 C4.2@18.3,40.6
  Top Layer w0.5: v1(16.507,40.6) C4.2 ; C4.2@18.3,40.6 19.5,41.8 19.5,42 R4.1
Supply+: F1.2 R1.2 X1.3 | length 45.8
  Top Layer w0.3: R1.2 R1.2@22.375,11.125 ; v1@22.375,12.375 v1(22.4,12.4)
  Top Layer w1: F1.2 R1.2 ; R1.2@22.375,11.125 v1@22.375,12.375
  Bottom Layer w1: v1(22.4,12.4) 23.7,13.7 31.714,13.7 32.3,14.286 32.3,26.228 35.5,29.428 35.5,42.479 36.98,43.959 X1.3
Torque_N: R10.2 X1.1 | length 9
  Top Layer w0.5: R10.2 33.75,46.465 X1.1
Torque_P: R11.2 X1.15 | length 9.7
  Top Layer w0.5: R11.2 33.75,34.15 36.21,31.69 X1.15
VIN_unfused: F1.1 X3.1 X3.9 | length 5.9
  Top Layer w0.3: F1.1@15.6,11.11 F1.1
  Top Layer w1: X3.1 X3.9 F1.1@15.6,11.11
pads on no net: MH1.1 MH2.1 MH3.1 MH4.1 X1.2 X1.4 X1.5 X1.6 X1.7 X1.8 X1.9 X1.10 X1.11 X1.12 X1.13 X2.A7 X2.A8 X2.MH1 X2.MH2

## Polygon pours and split planes (outlines as drawn)
GND on Bottom Layer "GND_L04_P000" (solid, pour order 0): 2,2 2,78 48,78 48,2

## Other copper
Bottom Layer:
  pour cut-out: 3,36.052 8,36.052 8,41.052 3,41.052
  pour cut-out: 3,64.5 8,64.5 8,69.5 3,69.5
  pour cut-out: 2,2 7,2 7,7 2,7
  pour cut-out: 43,2 48,2 48,7 43,7
  pour cut-out: 43,73 48,73 48,78 43,78
  pour cut-out: 2,73 7,73 7,78 2,78

## Silkscreen, mask and mechanical layers (free items; w line width, h text height)
Top Overlay:
  text "5V" at 29.254,15.454 h1.52
  text "24V" at 29.254,10.354 h1.52
Mechanical 1:
  the board outline again, w0.1

## Dimensions
141.141,0 to 141.141,100 on Mechanical 2
146.143,97.802 to -14.84,72.216 on Mechanical 2
141.141,100 to -14.853,72.225 on Mechanical 2
141.141,100 to 0.031,100 on Mechanical 2

## Text inside footprints (layer, text, board x,y; h text height)
Serial1: Top Overlay "Serial-Nr." at 35.39,7.41 h1.5; Top Assembly "SerialNr" at 36.3,5.8 h0.7
X1: Top Assembly "PCB EDGE" at 49.553,60.161 h1.27 r90